# Altium PCB Anemoia-ESP32-SMD.PcbDoc (part 3 of 3)
Units mm, origin at the board's own origin, x right, y up, seen from the top; angles counter-clockwise.
Board outline 118.5 x 51 mm, 2 copper layers (Top Layer, Bottom Layer), stack 1.57 mm thick; 96 components, 75 nets, 376 pads, 286 vias.
Unrouted connection lines stored in the file: 8.
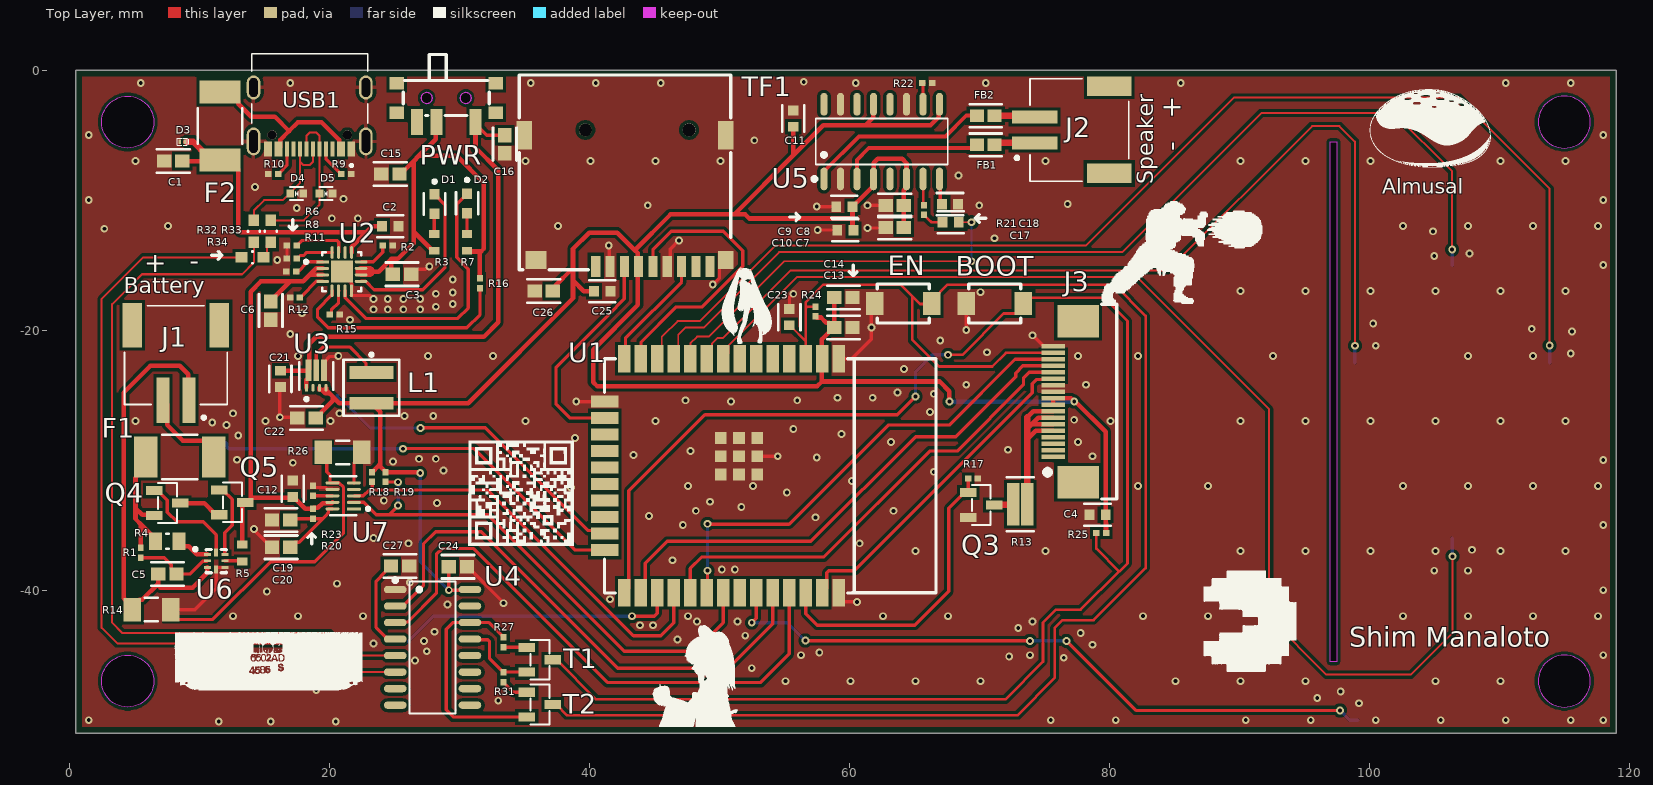
[diagram p0: Top Layer view]

## Via types
v1: diameter 0.6, hole 0.3, Top Layer to Bottom Layer, tented both sides, 286 vias

## Nets (pads, with @x,y where several pads share a name; then routed paths per layer and width w, separated by ;. In a path a pad name is that pad's centre, name@x,y a point inside that pad or via, vN(x,y) a via of type N, cw(c..) or ccw(c..) an arc to the next point about the centre after c; other vN are vias at no path point) (continued)
IO12: TF1.7 U1.14 | length 8.9
  Top Layer w0.254: U1.14 42.782,-22.108 42.782,-20.618 47.1,-16.3 TF1.7
IO13: TF1.3 U1.16 | length 17
  Top Layer w0.254: U1.16 38.505,-26.755 37.45,-25.7 37.45,-22.85 41.5,-18.8 42.7,-17.6 TF1.3
IO14: TF1.5 U1.13 | length 22.1
  Top Layer w0.254: U1.13 43.982,-22.178 43.982,-20.918 46.687,-18.213 48.687,-18.213 51.8,-15.1 51.8,-13.9 50.3,-12.4 46.3,-12.4 44.9,-13.8 TF1.5
IO15: B.1 U1.23 | length 25.1
  Top Layer w0.254: v1@27,-27.5 32,-27.5 39.913,-35.413 40.962,-35.413 U1.23
  Bottom Layer w0.254: B.1@20.625,-25 20.625,-25.125 20.873,-25.373 20.998,-25.373 23.152,-27.527 v1(27.027,-27.527)
IO16: Start.1 U1.27 | length 21.7
  Top Layer w0.254: v1(43.3,-42) 45.006,-42 45.23,-41.776 U1.27
  Bottom Layer w0.254: Start.1@26.125,-44 26.125,-43.875 28,-42 v1(43.3,-42)
IO17: R18.1 U1.28 U7.3 | length 32.8
  Top Layer w0.254: U7.3 22.615,-32.75 23.065,-32.3 23.3,-32.3 ; R18.1 23.3,-32.3 ; U1.28 46.5,-42.5 45.5,-43.5 43.4,-43.5 32.2,-32.3 23.3,-32.3
IO18: J3.16 U1.30 | length 37.2
  Top Layer w0.254: U1.30 49.1,-40.14 v1(49.1,-38.5) ; v1(49.1,-34.9) 49.134,-34.934 55.366,-34.934 63,-27.3 67.7,-27.3 72.75,-22.25 J3.16
  Bottom Layer w0.254: v1(49.1,-38.5) v1(49.1,-34.9)
IO19: R19.1 U1.31 U7.2 | length 40.5
  Top Layer w0.254: U7.2@21.509,-33.25 22.65,-33.25 23.6,-34.2 24.6,-34.2 ; R19.1 24.334,-31.684 25.291,-31.684 v1(25.3,-31.693) ; v1(25.3,-33.5) 24.6,-34.2 ; U1.31 50.31,-42.49 48.1,-44.7 42.7,-44.7 32.2,-34.2 24.6,-34.2
  Bottom Layer w0.254: v1(25.3,-33.5) v1(25.3,-31.693)
IO21: Select.1 U1.33 | length 52.2
  Top Layer w0.254: v1(52.5,-42.5) 52.85,-42.15 U1.33 ; v1(56.625,-43.875) 56.637,-43.887 73.887,-43.887 v1(73.9,-43.9) ; v1(76.7,-43.9) 82.05,-49.25 v1(97.75,-49.25)
  Bottom Layer w0.254: v1(52.5,-42.5) 55.25,-42.5 v1(56.625,-43.875) ; v1(73.9,-43.9) v1(76.7,-43.9) ; v1(97.75,-49.25) 98.5,-50 Select.1@99.125,-50
IO22: Q3.1 R17.2 U1.36 | length 23.5
  Top Layer w0.254: U1.36 56.66,-41.81 57.55,-42.7 65.05,-42.7 67.65,-40.1 67.65,-33.7 68.627,-32.723 68.927,-32.723 Q3.1 R17.2
IO23: J3.13 U1.37 | length 25.7
  Top Layer w0.254: U1.37 58.278,-39.852 58.278,-38.649 58.427,-38.5 60.4,-38.5 74.085,-24.815 74.085,-24.115 74.407,-23.793 75.657,-23.793 J3.13
IO25: C17.2 U1.10 | length 29.4
  Top Layer w0.15: U1.10 47.787,-22.183 47.787,-21.013 48.3,-20.5 49.2,-20.5 55,-14.7 v1(69.4,-14.7) ; C17.2 v1(69.4,-11.7)
  Bottom Layer w0.15: v1(69.4,-14.7) v1(69.4,-11.7)
IO26: U1.11 Up.1 | length 77.7
  Top Layer w0.15: U1.11 46.848,-21.852 46.848,-20.352 47.4,-19.8 48.8,-19.8 54.6,-14 81,-14 91.7,-3.3 101.882,-3.3 106.375,-7.793 v1(106.375,-13.8)
  Bottom Layer w0.254: Up.1@106.375,-15 v1(106.375,-13.8)
IO27: Left.1 U1.12 | length 94
  Top Layer w0.15: U1.12 45.578,-21.852 45.578,-20.516 45.7,-20.394 46.794,-19.3 48.5,-19.3 54.3,-13.5 78.2,-13.5 89.6,-2.1 106.86,-2.1 113.875,-9.115 v1(113.875,-21.186)
  Bottom Layer w0.254: Left.1@113.875,-22.5 v1(113.875,-21.186)
IO32: Down.1 U1.8 | length 89.9
  Top Layer w0.15: U1.8 50.71,-21.8 50.71,-21.19 56,-15.9 82.1,-15.9 92.3,-26.1 92.3,-42.1 96.7,-46.5 103.2,-46.5 106.4,-43.3 v1(106.4,-37.4) ; U1.8@50.31,-21.99 U1.8@50.4,-21.9
  Bottom Layer w0.254: Down.1@106.375,-36 106.387,-36.012 106.387,-37.387 v1(106.4,-37.4)
IO33: Right.1 U1.9 | length 75.2
  Top Layer w0.15: U1.9 49.44,-21.8 49.44,-21.06 49.9,-20.6 50.3,-20.6 55.5,-15.4 84.5,-15.4 95.6,-4.3 97.7,-4.3 98.9,-5.5 v1(98.9,-21.2)
  Bottom Layer w0.254: Right.1@98.875,-22.5 98.887,-22.488 98.887,-21.213 v1(98.9,-21.2)
NetC5_2: C5.2 R1.1 U6.2 | length 6.3
  Top Layer w0.254: R1.1 7.3,-37.5 7.857,-38.057 7.857,-38.374 8.233,-38.75 C5.2 8.265,-38.765 9.285,-38.765 10.273,-37.777 10.598,-37.777 U6.2
NetC16_2: C16.2 C21.1 PWR.1 U3.1 U3.7 | length 39.6
  Top Layer w0.254: PWR.1 31.25,-4.126 32.122,-4.999 C16.2
  Top Layer w0.35: C21.1 18.352,-23.123 U3.7 ; U3.1 18.25,-23.825 18.4,-23.675 U3.7 ; PWR.1@31.25,-4.126 31.25,-5.95 33,-7.7 33,-19.4 31.9,-20.5 19,-20.5 18.454,-21.046 18.454,-23.021 U3.7
NetC17_1: C17.1 R21.1 | length 1.7
  Top Layer w0.2: R21.1 65.75,-11.15 65.848,-11.248 65.873,-11.248 66.253,-11.628 66.325,-11.7 C17.1
NetC18_2: C18.2 U5.8 | length 2
  Top Layer w0.254: U5.8 67.004,-8.431 67.004,-10.181 C18.2
NetC19_2: C19.2 C20.2 R20.1 U7.10 | length 7.2
  Top Layer w0.254: C19.2 17.101,-34.5 R20.1 19.5,-34.5 ; C20.2 17.38,-36.324 17.676,-36.324 19.5,-34.5 ; U7.10 19.948,-33.75 19.939,-33.759 19.939,-34.061 19.719,-34.281 19.5,-34.5
NetC27_1: C27.1 U4.4 | length 7.5
  Top Layer w0.254: U4.4 24.485,-43.765 23.6,-42.88 23.6,-39.299 24.324,-38.576 24.324,-38.526 24.7,-38.15 C27.1 C27.1@25.078,-38.478
NetD1_1: D1.1 U2.9 | length 13.4
  Top Layer w0.254: U2.9 22.795,-16.25 23.445,-16.9 27.2,-16.9 28.9,-15.2 28.9,-10.35 D1.1
NetD1_2: D1.2 R3.1 | length 1.6
  Top Layer w0.254: R3.1 28.075,-11.075 D1.2
NetD2_1: D2.1 U2.7 | length 20.5
  Top Layer w0.254: U2.7 21.223,-17.523 22.8,-19.1 29.9,-19.1 30.7,-18.3 30.7,-15.3 29.8,-14.4 29.8,-10.3 D2.1
NetD2_2: D2.2 R7.1 | length 1.6
  Top Layer w0.254: R7.1 D2.2
NetF1_1: F1.1 J1.2 | length 7
  Top Layer w0.35: J1.2 7.525,-25.7 7.525,-27.275 8.75,-28.5 10.4,-28.5 11.115,-29.215 F1.1
NetF1_2: F1.2 Q4.2 R1.2 R4.2 | length 10.9
  Top Layer w0.35: R1.2 5.5,-35.1 5.587,-35.013 ; F1.2 5.17,-30.465 5.17,-31.285 5.1,-31.355 5.1,-33.7 ; Q4.2 6.505,-34.205 5.605,-34.205 5.1,-33.7 ; R4.2 6.65,-36.075 5.587,-35.013 ; 5.1,-33.7 5.1,-34.525 5.587,-35.013
NetF2_1: F2.1 USB1.A4-B9 USB1.A9-B4 | length 13.8
  Top Layer w0.35: F2.1 12.285,-1.685 13,-2.4 13,-2.6 14,-3.6 15.825,-3.6 16.91,-4.685 ; USB1.A9-B4 16.225,-5.938 16.225,-5.37 16.91,-4.685 ; USB1.A4-B9 20.775,-5.938 20.775,-5.37 19.405,-4 17.595,-4 16.91,-4.685
NetFB1_1: FB1.1 U5.3 | length 11.2
  Top Layer w0.3: U5.3 60.595,-6.905 61.5,-6 69.574,-6 FB1.1
NetFB2_1: FB2.1 U5.1 | length 14.1
  Top Layer w0.3: U5.1 58.055,-7.78 60.735,-5.1 67.4,-5.1 69,-3.5 FB2.1
NetJ3_5: J3.5 J3.6 J3.7 J3.8 R13.1 | length 15.1
  Top Layer w0.35: 73.704,-28.4 74.354,-27.75 J3.5 ; 73.704,-27.596 74.05,-27.25 ; 73.704,-26.696 74.15,-26.25 J3.8 ; J3.6 74.05,-27.25 ; J3.7 74.55,-26.75 74.05,-27.25
  Top Layer w0.5: R13.1 73.704,-28.4 73.704,-27.596 73.704,-26.696
NetL1_1: L1.1 U3.6 | length 6.8
  Top Layer w0.254: U3.6 19,-21.8 19.5,-21.3 21.6,-21.3 22.828,-22.528 22.828,-22.887 23.191,-23.25 L1.1
NetQ3_3: Q3.3 R13.2 | length 1.5
  Top Layer w0.5: Q3.3 72.55,-33.45 R13.2
NetQ4_1: Q4.1 U6.8 | length 7.8
  Top Layer w0.254: Q4.1@6.825,-32.35 7.55,-33.075 7.55,-34 8.3,-34.75 10.3,-34.75 11.3,-35.75 U6.8
NetQ4_3: Q4.3 Q5.2 | length 3.4
  Top Layer w0.35: Q4.3 10.375,-33.3 11.275,-34.2 Q5.2
NetQ5_1: Q5.1 U6.7 | length 5.8
  Top Layer w0.254: Q5.1 11.825,-32.3 12.55,-33.025 12.55,-35 11.975,-35.575 U6.7
NetR2_1: R2.1 U2.12 | length 2.5
  Top Layer w0.254: U2.12 23.4,-14.75 24.125,-14.025 R2.1
NetR4_1: R4.1 U6.1 | length 2.6
  Top Layer w0.35: R4.1 8.45,-36.259 8.823,-36.632 9.182,-36.632 9.8,-37.25 U6.1
NetR5_1: R5.1 U6.6 | length 1.3
  Top Layer w0.254: U6.6@11.959,-37.75 R5.1@13.3,-37.75
NetR6_2: R6.2 U2.15 | length 4.2
  Top Layer w0.254: R6.2 17.525,-13.5 17.623,-13.402 17.623,-13.399 17.922,-13.1 20.574,-13.1 20.723,-13.249 U2.15
NetR8_2: R8.2 U2.16 | length 2.9
  Top Layer w0.254: R8.2@17.525,-14.5 17.623,-14.402 17.628,-14.402 17.772,-14.258 18.042,-14.258 18.273,-14.027 U2.16
NetR9_2: R9.2 USB1.A5 | length 2.4
  Top Layer w0.254: USB1.A5 19.75,-6.825 20.802,-7.877 20.802,-7.902 20.9,-8 R9.2
NetR10_2: R10.2 USB1.B5 | length 2.2
  Top Layer w0.254: R10.2 16.1,-8 16.198,-7.902 16.198,-7.877 16.75,-7.325 USB1.B5
NetR11_1: R11.1 U2.1 | length 2.3
  Top Layer w0.254: R11.1@17.525,-15.575 18.35,-14.75 U2.1
NetR12_1: R12.1 U2.4 | length 2.3
  Top Layer w0.254: R12.1 17.775,-17.5 17.873,-17.402 17.873,-17.377 19,-16.25 U2.4
NetR21_2: R21.2 U5.7 | length 1.9
  Top Layer w0.2: R21.2@65.705,-10.19 U5.7@65.705,-8.383
  Top Layer w0.254: U5.7 U5.7@65.734,-8.431
NetR22_2: R22.2 U5.10 | length 1.7
  Top Layer w0.254: U5.10 65.675,-1.075 R22.2@65.75,-1
NetR23_2: R23.2 U7.8 | length 1.5
  Top Layer w0.254: R23.2@18.75,-32.75 U7.8
NetR27_2: R27.2 T1.1 | length 1.8
  Top Layer w0.254: R27.2 33.413,-44.388 35.187,-44.388 T1.1
NetR31_2: R31.2 T2.1 | length 2.1
  Top Layer w0.254: R31.2 33.4,-47.1 34.15,-47.85 T2.1
NetR33_2: R33.2 R34.1 | length 1.4
  Top Layer w0.156: R34.1@15.227,-14.127 R33.2@15.227,-13.523
  Top Layer w0.254: R34.1 14.954,-14.4 R34.1@15.227,-14.127 ; R33.2@15.227,-13.523 R33.2
OUT+: FB2.2 J2.2 | length 3.1
  Top Layer w0.5: FB2.2 74.15,-3.5 J2.2
OUT-: FB1.2 J2.1 | length 3.2
  Top Layer w0.5: FB1.2@71.25,-5.75 FB1.2 71.326,-5.6 J2.1
PACK+: C6.2 C12.2 Q5.3 R5.2 R20.2 U2.2 U2.3 U7.9 | length 36.3
  Top Layer w0.35: R5.2 13.3,-33.473 13.523,-33.25 13.825,-33.25 13.954,-33.121 Q5.3@13.954,-32.9 ; C6.2 15.5,-17.75 17,-16.25 ; C12.2 17.127,-32.9 Q5.3@13.954,-32.9 ; C12.2@17.227,-32.827 18.15,-33.75 R20.2 R20.2 ; U2.3 18.5,-15.75 ; U2.2 19,-15.25 18.5,-15.75 ; U7.9 20.193,-33.307 19.493,-33.307 19.125,-33.675 18.8,-33.675 R20.2@18.75,-33.725 ; Q5.3@13.954,-32.9 13.954,-17.046 14.75,-16.25 17,-16.25 ; 17,-16.25 18,-16.25 18.5,-15.75 ; R20.2@18.75,-33.725 R20.2 R20.2@18.75,-33.725
PACK-: A.2 B.2 BOOT.1 C1.1 C2.2 C3.1 C4.1 C6.1 C7.1 C8.1 C9.1 C10.1 C11.1 C12.1 C13.2 C14.1 C15.1 C16.1 C18.1 C19.1 C20.1 C21.2 C22.1 C23.2 C24.2 C25.1 C26.1 C27.2 D3.2 D4.1 D5.1 Down.2 EN.1 J3.11 J3.12 J3.18 Left.2 Q3.2 R2.2 R6.1 R8.1 R9.1 R10.1 R11.2 R12.2 R14.2 R15.2 R17.1 R22.1 R23.1 R26.1 R26.2 Right.2 Select.2 Start.2 TF1.2 TF1.6 TF1.10 TF1.11 TF1.12 TF1.13 U1.1 U1.15 U1.38 U2.8 U2.17 U3.5 U4.1 U5.2 U5.11 U5.15 U6.4 U6.5 U7.5 U7.6 U7.7 Up.2 USB1.1 USB1.2 USB1.3 USB1.4 USB1.A1-B12 USB1.A12-B1 | length 80.7
  Top Layer w0.254: R14.2@7.8,-41.699 R14.2 9.662,-41.5 11.3,-39.862 U6.4 11.3,-38.275 11.323,-38.252 11.973,-38.252 U6.5 ; R14.2@8.351,-42.25 11.05,-42.25 15.488,-37.812 18.888,-37.812 21.1,-35.6 21.1,-32.1 20.75,-31.75 U7.6 20.075,-31.75 20.066,-31.741 20.066,-31.166 19.8,-30.9 19.8,-29.652 R26.2 ; v1(14.203,-35.3) 14.203,-35.351 15.553,-36.7 C20.1 ; R10.1@15.275,-8.05 R10.1 ; C21.2 16.2,-24.427 v1(16.2,-26.7) 17.499,-26.7 C22.1 ; R8.1 R6.1 ; R23.1 18.754,-32.002 18.852,-32.1 19.706,-32.1 19.856,-32.25 U7.7 ; U3.5 19.6,-22.475 20.052,-22.023 20.677,-22.023 v1(20.7,-22) ; U2.17 21.686,-16.213 21.686,-16.339 21.709,-16.362 21.709,-16.405 21.723,-16.419 U2.8 ; U2.8@21.7,-17.329 23.078,-17.329 23.349,-17.6 v1(23.4,-17.6) ; U7.5@21.893,-31.759 U7.5 21.902,-30.224 22.5,-29.626 R26.1 ; C3.1@26.001,-15.7 C3.1@26.05,-15.7 ; C27.2 C27.2@26.2,-38.101 ; C3.1 26.676,-15.324 27.382,-15.324 27.606,-15.1 v1(27.7,-15.1) ; C24.2 30.651,-38.2 33.4,-40.949 v1(33.4,-41) ; v1(39,-25.5) 41.18,-25.5 U1.15 ; v1(41.5,-13.5) 41.55,-13.55 41.55,-15.05 TF1.2 ; TF1.6 46.223,-14.877 46.223,-13.777 v1(46.9,-13.1) ; v1(49.5,-16.5) 50.024,-15.976 50.024,-15.073 TF1.10 ; U1.38@52.919,-29.7 v1(54.5,-29.7) ; C23.2@55.4,-18.299 55.4,-17.509 v1(55.7,-17.209) ; v1(57.5,-10.5) C9.1 ; v1(57.573,-12.3) C10.1 ; U1.38@59.2,-40.2 59.2,-40.552 59.548,-40.9 v1(60.6,-40.9) ; U1.1 60.2,-22.2 61.7,-20.7 v1(61.7,-19.8) 61.7,-18.2 EN.1 ; v1(61.4,-12.15) 62.749,-12.15 C7.1 ; v1(61.4,-10.4) C8.1 ; v1(69,-20) BOOT.1@69,-17.899 ; v1(74.1,-20.4) 74.12,-20.4 74.97,-21.25 J3.18
  other v1: 11.5,-50.1 15.5,-50.1 20.5,-50.1 1.5,-50 75.5,-50 80.5,-50 90.5,-50 95.5,-50 100.5,-50 105.5,-50 110.5,-50 115.5,-50 118,-50 99.2,-48.7 33,-48.5 96,-48.3 97.8,-47.8 19,-47.7 9.8,-47.3 14.3,-47.2 55.1,-47 60.1,-47 65.1,-47 70.1,-47 85.1,-47 90.1,-47 95.1,-47 105.1,-47 110.1,-47 52.5,-46 26.6,-45.4 76.5,-45.2 72.3,-45.1 56.3,-45 73.9,-45 118,-45 57.7,-44.8 27.5,-44.7 78.7,-44.2 23.4,-44.1 27.3,-43.9 46.8,-43.8 52,-43.5 77.8,-43.3 28.1,-43.2 73,-42.9 43.9,-42.7 44.9,-42.7 48.3,-42.4 51.4,-42.4 74.1,-42.4 12.6,-42 17.6,-42 22.6,-42 47.6,-42 62.6,-42 67.6,-42 82.6,-42 87.6,-42 102.6,-42 107.6,-42 112.6,-42 117.6,-42 29.1,-41.1 41.6,-40.7 15.2,-40.1 118,-40 20.6,-39.5 26.2,-39.4 105,-38.5 107.6,-38.5 50.2,-38.4 51.2,-38.4 46.4,-37.7 65.1,-37 75.1,-37 90.1,-37 95.1,-37 100.1,-37 105.1,-37 110.1,-37 115.1,-37 107.9,-36.9 26.1,-36.4 60.8,-36.4 23.4,-36 47.2,-35 118,-35 57.4,-34.4 44.6,-34.3 48.2,-33.9 63.4,-33.9 51.7,-33.6 28.3,-33.3 49.3,-33.2 24.2,-33.1 55.2,-32.5 38.6,-32.1 47.6,-32 52.6,-32 82.22,-32 87.6,-32 102.6,-32 107.6,-32 112.6,-32 117.6,-32 60.2,-31.6 66.5,-30.9 28.8,-30.8 17.2,-30.2 24.9,-30.1 118,-30 12.902,-29.97 26.9,-29.9 28.2,-29.9 57.5,-29.8 78.7,-29.7 43.4,-29.6 47.8,-29.3 72.2,-29.2 63.2,-28.6 77.6,-28.6 38.9,-28.3 13,-28.1 59.4,-28 55.7,-27.6 12.1,-27.3 11,-27.1 5.1,-27 15.1,-27 20.1,-27 35.1,-27 45.1,-27 80.1,-27 90.1,-27 95.1,-27 100.1,-27 105.1,-27 110.1,-27 115.1,-27 77.3,-26.9 25.8,-26.6 28,-26.6 12.6,-26.4 20.8,-26.4 66.2,-26.3 50.9,-25.5 47.4,-25.4 56,-25.4 59.1,-25.2 61.8,-25.2 66.5,-24.9 63.7,-24.8 69,-24.2 78.2,-24.2 64.2,-23 17.6,-22 27.6,-22 32.6,-22 77.6,-22 82.22,-22 92.6,-22 107.6,-22 112.6,-22 115.5,-21.8 70.6,-21.7 100.5,-21.2 67,-20.8 17,-20.3 115.6,-20.1 112.5,-19.9 100.3,-19.5 21.6,-19.2 17.9,-18.7 23.4,-18.4 24.5,-18.4 25.7,-18.4 27,-18.4 28.2,-18.2 29.5,-18 24.5,-17.6 25.7,-17.6 27,-17.6 28.2,-17.2 29.5,-17.1 70.1,-17.08 90.1,-17 95.1,-17 100.1,-17 105.1,-17 110.1,-17 115.1,-17 29.5,-16.1 118,-15 16,-14.6 105,-14.3 107.7,-14.1 71.178,-12.934 104.9,-12.4 2.7,-12.2 7.6,-12 37.6,-12 102.6,-12 107.6,-12 112.6,-12 117.6,-12 20.2,-11.4 22.2,-11.4 17.5,-10.6 44.5,-10.4 70,-10.4 76.8,-10.3 1.5,-10 118,-10 21.1,-9.9 14.3,-9 68.4,-8.1 5.1,-7 35.1,-7 40.1,-7 45.1,-7 50.1,-7 75.1,-7 90.1,-7 95.1,-7 100.1,-7 110.1,-7 115.1,-7 52.7,-5.4 1.5,-5 118,-5 5.5,-1 17,-1 35.5,-1 40.5,-1 45.5,-1 60.5,-1 70.5,-1 85.5,-1 110.5,-1 115.5,-1 56.5,-0.9
RTS#: R27.1 T2.2 U4.14 | length 17.7
  Top Layer w0.254: R27.1 33.4,-43.6 32.295,-42.495 U4.14 29.505,-42.495 29,-43 29,-49.2 29.55,-49.75 T2.2
RXD0: U1.34 U4.2 | length 41.4
  Top Layer w0.254: U4.2 25.67,-41.225 27.25,-39.645 27.25,-36.45 28.2,-35.5 31.7,-35.5 42.2,-46 50.7,-46 54.12,-42.58 U1.34
TXD0: U1.35 U4.3 | length 44.3
  Top Layer w0.254: U4.3 25.123,-42.449 26.051,-42.449 28.25,-40.25 28.25,-37.25 28.7,-36.8 31.1,-36.8 41.4,-47.1 53.2,-47.1 55.39,-44.91 U1.35
VBUS: C1.2 C2.1 D3.1 F2.2 U2.13 | length 25.2
  Top Layer w0.35: C1.2 10.915,-7 11,-6.915 12.285,-6.915 13,-7.63 13,-12.302 13.164,-12.465 22.835,-12.465 ; U2.13 21.723,-13.577 22.835,-12.465 ; C2.1 23.3,-12 22.835,-12.465
  Top Layer w0.5: 9,-5.5 9.535,-5.5 10.152,-6.117 10.152,-6.152 F2.2@10.915,-6.915
VSYS: C3.2 C15.2 PWR.2 R3.2 R7.2 R16.2 U2.10 U2.11 | length 34.9
  Top Layer w0.254: U2.10 22.446,-15.5 U2.11
  Top Layer w0.35: 23.1,-15.5 23.8,-15.5 24.776,-14.524 ; C3.2 24.776,-15.578 24.776,-14.524 ; C15.2 25.729,-7.672 25.828,-7.672 26.5,-7 ; R3.2 27.975,-13.9 26.5,-12.425 ; PWR.2@28.25,-3.883 28.189,-3.944 28.189,-5.311 26.9,-6.6 ; R7.2@30.6,-13.95 31.675,-13.95 ; R16.2 31.575,-16 31.575,-14.05 31.675,-13.95 ; 24.776,-14.524 25.276,-14.524 26.5,-13.3 26.5,-12.425 ; 26.5,-12.425 26.5,-9.145 26.5,-7 ; 26.5,-7 26.9,-6.6 ; 26.9,-6.6 29.8,-6.6 31.9,-8.7 31.9,-13.725 31.675,-13.95
  Top Layer w0.85: 22.446,-15.5 23.1,-15.5
pads on no net: J1.S1 J1.S2 J2.S1 J2.S2 J3.1 J3.2 J3.3 J3.4 J3.19 J3.20 PWR.3 PWR.4 PWR.5 PWR.6 PWR.7 TF1. TF1.1 TF1.8 TF1.9 U1.4 U1.5 U1.6 U1.7 U1.17 U1.18 U1.19 U1.20 U1.21 U1.22 U1.32 U2.14 U3.2 U4.7 U4.8 U4.9 U4.10 U4.11 U4.12 U4.15 U5.5 U5.12 U5.14 U5.16 U7.1 U7.4 USB1. USB1.A8 USB1.B8

## Polygon pours and split planes (outlines as drawn)
PACK- on Top Layer "NONET_L-01_P-001" (solid, remove dead copper, pour order 1): 1,-0.5 118.5,-0.5 118.5,-50.5 1,-50.5
PACK- on Bottom Layer "NONET_L-01_P-001" (solid, pour order 2): 1,-0.5 118.5,-0.5 118.5,-50.5 1,-50.5

## Other copper
Top Layer:
  pour cut-out: 20.4,-28.4 18.7,-28.4 18.7,-30.4 20.4,-30.4
  pour cut-out: 19.4,-28.8 22.6,-28.8 22.6,-32 19.4,-32
  pour cut-out: 18.725,-37.55 18.675,-37.5 15.3,-37.5 11,-41.8 11,-41.9 7.1,-41.9 7.1,-42.5 7.2,-42.6 11.3,-42.6 15.7,-38.2 18.9,-38.2 19.05,-38.05
  pour cut-out: 21.375,-35.725 19.05,-38.05 19,-38.05 18.725,-37.775 18.725,-37.55 20.775,-35.5 20.775,-35.475
  pour cut-out: 20.8,-32 21.375,-32 21.375,-35.725 20.775,-35.725

## Silkscreen, mask and mechanical layers (free items; w line width, h text height)
Top Overlay:
  drawing of 68 lines, arcs and shapes, not listed
  text "+" at 85.5,-3.746 h1.52 r90
  text "-" at 85.508,-6.246 h1.52 r90
  text "Speaker" at 83.378,-8.786 h1.22 r90
  text "Almusal" at 101,-9.5 h1.14
  text "+" at 7.496,-14.25 h1.52 r180
  text "-" at 9.996,-14.242 h1.52 r180
  text "Battery" at 4.214,-17.178 h1.22
  text "Shim Manaloto" at 98.454,-44.346 h1.52
Bottom Overlay:
  region: 12.214,-42.971 12.206,-42.971 12.206,-42.98 12.19,-42.98 12.19,-42.963 12.198,-42.963 12.198,-42.955 12.214,-42.955 12.214,-42.963
  region: 9.986,-42.947 9.978,-42.947 9.978,-42.939 9.994,-42.939 9.994,-42.947
  region: 14.369,-43.012 14.345,-43.012 14.345,-42.988 14.378,-42.988 14.378,-43.004 14.369,-43.004
  region: 9.896,-43.061 9.896,-43.029 9.904,-43.029 9.904,-43.02 9.937,-43.02 9.937,-43.045 9.92,-43.045 9.92,-43.053 9.912,-43.053 9.912,-43.069 9.896,-43.069
  region: 13.006,-42.939 13.006,-42.947 12.99,-42.947 12.99,-42.931 13.014,-42.931 13.014,-42.939
  lines w0.254: 27.6,-50.5 96.8,-50.5 96.8,-0.5 27.6,-0.5 27.6,-50.5 ; 30.45,-47.1 88.05,-47.1 88.05,-3.9 30.45,-3.9 30.45,-47.1
  text "Anemoia-ESP32" at 4.546,-10.154 h2.54 r90
  text "Screen" at 66.046,-49.646 h1.52
Mechanical 1:
  circle w0.254: c4.5,-4 r2
  circle w0.254: c4.5,-47 r2
  circle w0.254: c115,-4 r2
  circle w0.254: c115,-47 r2
  lines w0.254: 0.5,-51 119,-51 119,0 0.5,0 0.5,-51 ; 97,-45.5 97.5,-45.5 97.5,-5.5 97,-5.5 97,-45.5